# Altium PCB CAN Logger 3e HP3651 PCB.PcbDoc (part 1 of 3)
Units mm, origin at the board's own origin, x right, y up, seen from the top; angles counter-clockwise.
Board outline 56.62 x 82.65 mm, 4 copper layers (Component Side, Signal Layer 2, Signal Layer 1, Solder Side), stack 0.844 mm thick; 116 components, 130 nets, 582 pads, 374 vias.
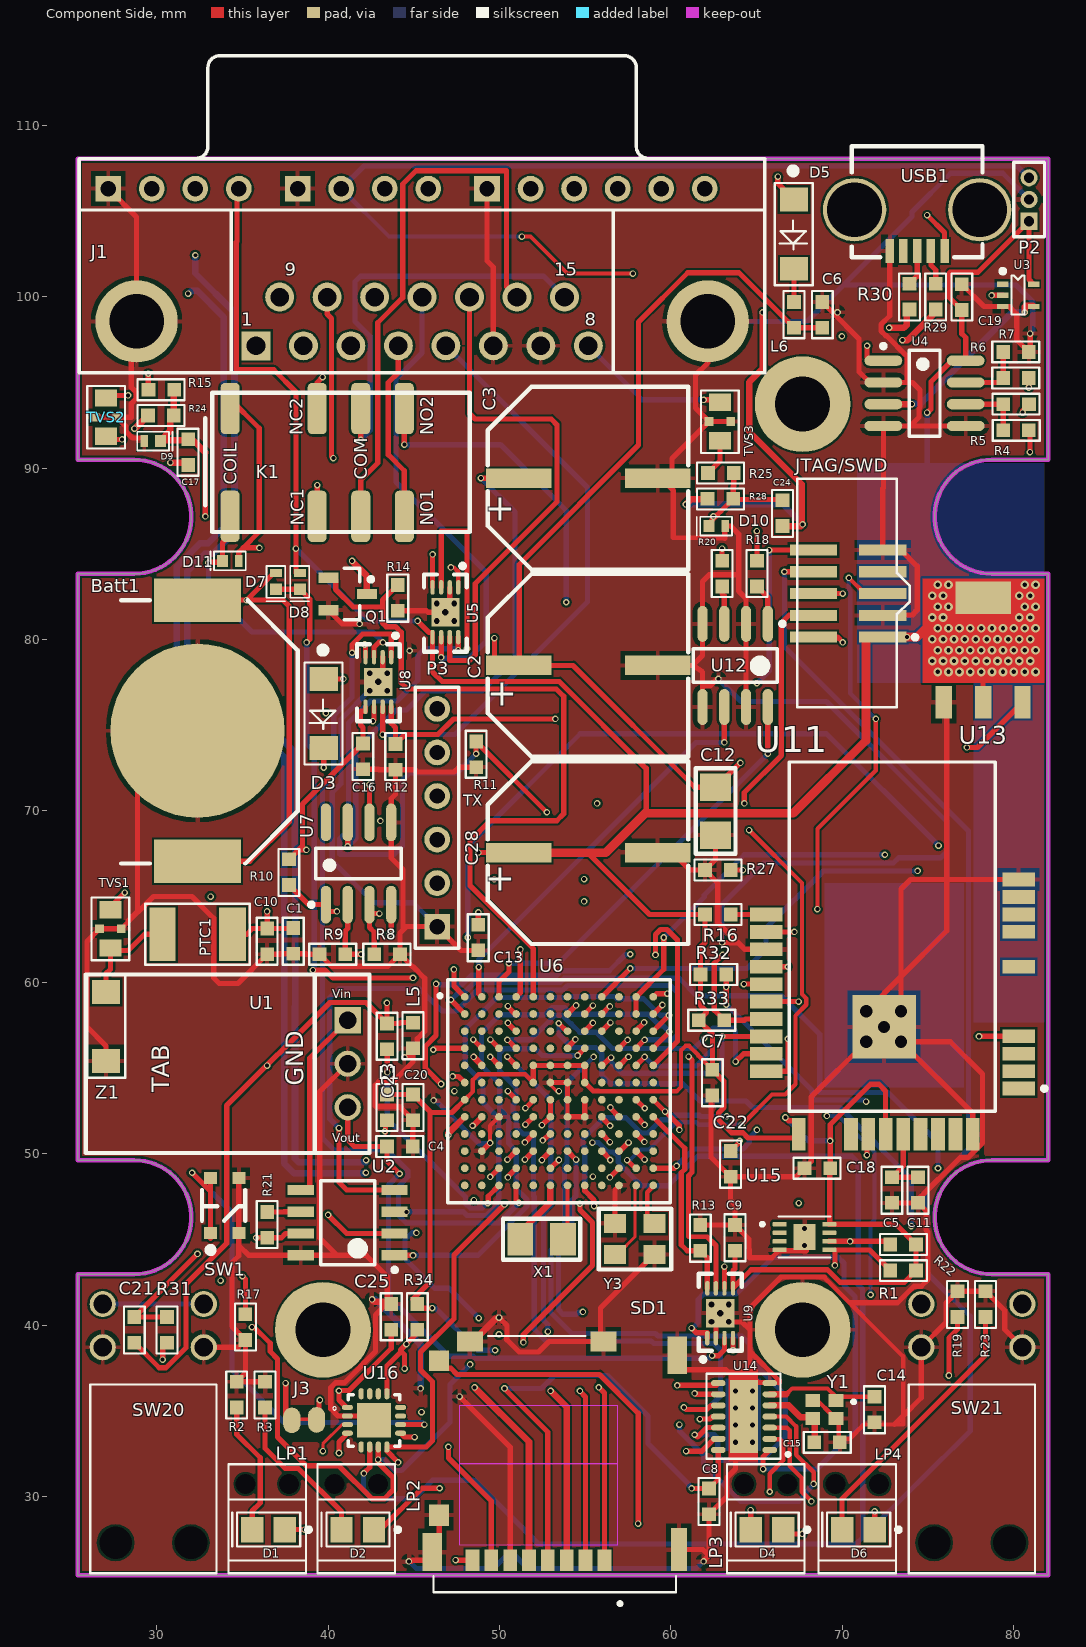
[diagram p0: Component Side view]
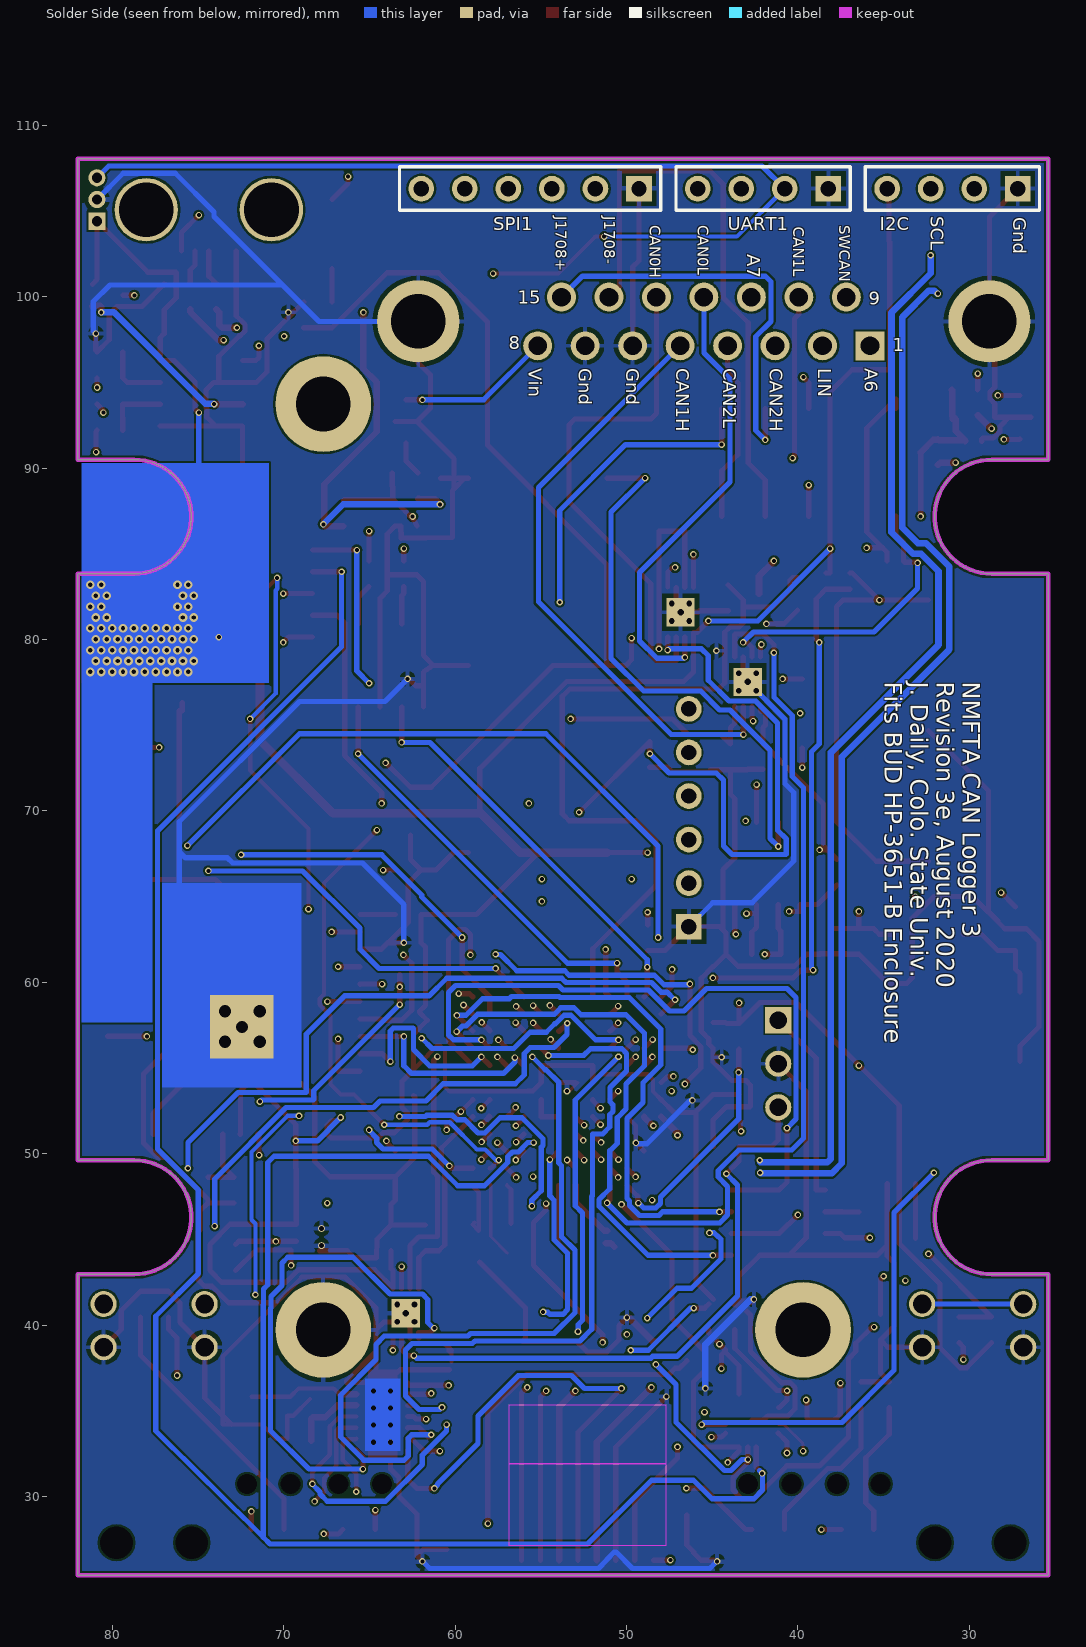
[diagram p1: Solder Side view, seen from below]
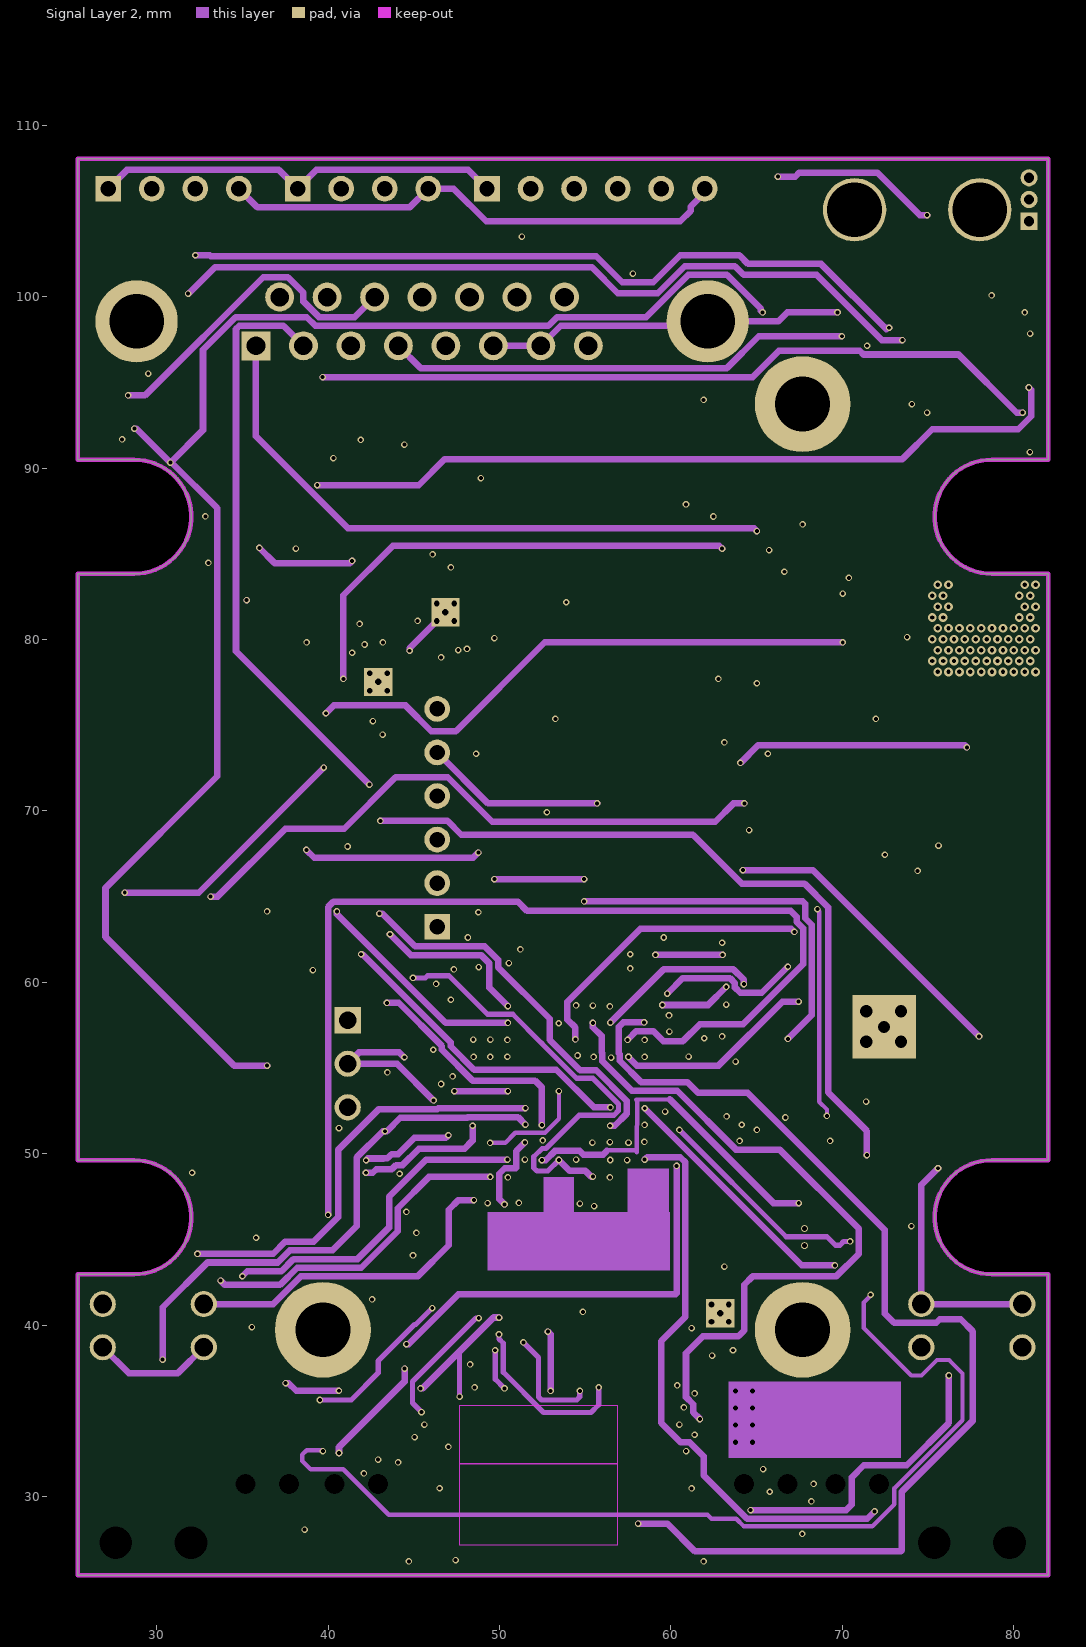
[diagram p2: Signal Layer 2]
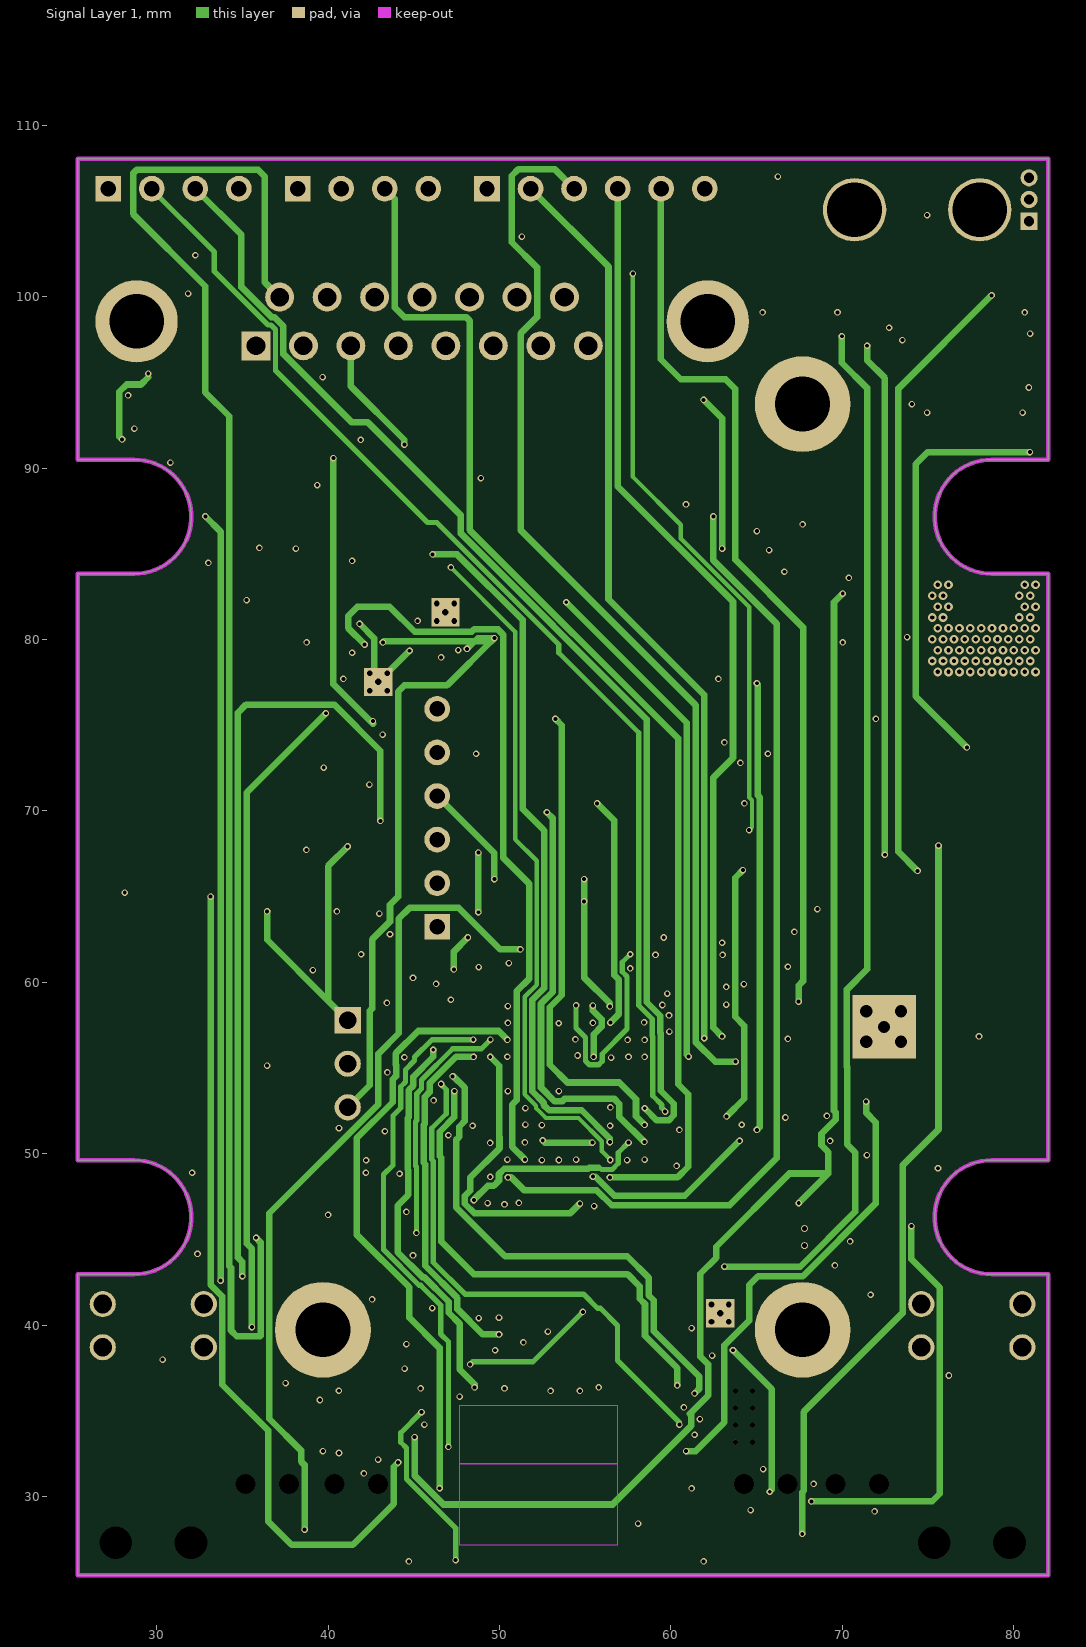
[diagram p3: Signal Layer 1]

## Layer stack, top to bottom
Top Solder: solder mask 0.0102, Solder Resist, Dk 3.5
Component Side: signal copper 0.0356
Dielectric 1: core 0.32, FR-4, Dk 4.8
Signal Layer 2: signal copper 0.036
Dielectric 5: prepreg 0.127, Dk 4.2
Signal Layer 1: signal copper 0.036
Dielectric 4: core 0.254, Dk 4.2
Solder Side: signal copper 0.0356
Bottom Solder: solder mask 0.0102, Solder Resist, Dk 3.5

## Board outline
25.4,25.4 25.4,42.964 28.702,42.964 ccw(c28.702,46.291) 28.702,49.619 25.4,49.619 25.4,83.833 28.702,83.833 ccw(c28.702,87.16) 28.702,90.487 25.4,90.487 25.4,108.052 82.017,108.052 82.017,90.487 78.715,90.487 ccw(c78.715,87.16) 78.715,83.833 82.017,83.833 82.017,49.619 78.715,49.619 ccw(c78.715,46.291) 78.715,42.964 82.017,42.964 82.017,25.4

## Design rules (kind name [scope] priority, off if disabled: settings)
Clearance [InComponent('U16')] p1: gap=0.076 ignorepadtopadclearanceinfootprint=TRUE
Clearance Clearance_1 [All] p2: gap=0.127 ignorepadtopadclearanceinfootprint=TRUE
DiffPairsRouting [All] p1: maxlimit=0.254 minlimit=0.254 mostfreqgap=0.254 toplayer_minwidth=0.381 toplayer_maxwidth=0.381 toplayer_prefwidth=0.381 midlayer1_minwidth=0.381 midlayer1_maxwidth=0.381 midlayer1_prefwidth=0.381 midlayer2_minwidth=0.381 midlayer2_maxwidth=0.381 midlayer2_prefwidth=0.381 bottomlayer_minwidth=0.381 bottomlayer_maxwidth=0.381 bottomlayer_prefwidth=0.381 maxuncoupledlength=12.7
HoleSize [All] p1: absolutevalues=TRUE maxlimit=6.35 minlimit=0.229 maxpercent=80.000 minpercent=20.000
MinimumSolderMaskSliver [All] p1: minsoldermaskwidth=0.025
PolygonConnect [All] p1: connectstyle=Relief reliefconductorwidth=0.254 reliefentries=4 polygonreliefangle="90 Angle" airgapwidth=0.254
RoutingVias [All] p1: holewidth=0.229 width=0.381 viastyle="Through Hole" minholewidth=0.229 minwidth=0.381 maxholewidth=0.711 maxwidth=1.27
SMDNeckDown [All] p1: percent=150.000
SilkToSilkClearance [All] p1: silktosilkclearance=0.025
SilkToSolderMaskClearance [IsPad] p1: minsilkscreentomaskgap=0.025 clearancetoexposedcopper=TRUE
SolderMaskExpansion [All] p1: expansion=0.102
Width Width_1 [All] p1: maxlimit=2.54 minlimit=0.178 preferedwidth=0.381 toplayer_prefwidth=0.305 midlayer1_minwidth=0.254 midlayer2_minwidth=0.254 bottomlayer_minwidth=0.254 bottomlayer_prefwidth=0.305 minimp=50.000000 maximp=50.000000 favimp=50.000000
25 further rules are at their usual default settings.

## Classes and differential pairs
component class "DIY Teensy 3.6 rev 3e": Batt1 C7 C13 C16 C18 C19 C20 C21 C22 C23 C25 D7 D8 J3 JTAG/SWD L1 L5 R31 R34 SD1 SW1 U6 U16 X1 Y3
component class "Teensy 3.6 with J1939 - Handheld Rev3e": C9 C10 C14 C15 C17 C24 D1 D2 D4 D6 D9 D10 I2C J1 P2 R2 R3 R8 R9 R10 R11 R12 R13 R15 R18 R19 R20 R21 R23 R24 R25 R28 R32 R33 SW20 SW21 TVS2 TVS3 U2 U5 U7 U8 U9 U12 U14 UART1 Y1
component class "Additional Circuits - Handheld - Rev 3e": C1 C2 C3 C4 C5 C6 C8 C11 C12 C28 D3 D5 D11 K1 L6 LP1 LP2 LP3 LP4 P3 PTC1 Q1 R1 R4 R5 R6 R7 R14 R16 R17 R22 R27 R29 R30 SPI1 TVS1 U1 U3 U4 U11 U13 U15 USB1 Z1
differential pair "USB D": +"USB D_P" -"USB D_N"

## Components (designator, comment, footprint, x,y, rotation, side; value= is the part's Value field where it differs from the comment)
Batt1 "CR1225" "Battery Clip - CR1225" 32.385,74.676 r270 top locked
C1 "0.1uF" 0603 37.973,62.41 r90 top
C2 "470µF" "Elec. Cap - G" 55.184,78.486 r180 top locked
C3 "100uF" "Elec. Cap - G" 55.184,89.408 r180 top locked
C4 "0.1uF" 0603 44.196,50.419 r0 top
C5 "0.1uF" 0603 72.898,47.879 r90 top
C6 "0.1uF" 0603 68.834,98.933 r270 top
C7 "0.1uF" 0603 62.423,54.149 r90 top
C8 "0.1uF" 0603 62.23,29.718 r90 top
C9 "0.1uF" 0603 63.738,45.085 r270 top
C10 "2.2uF" 0603 36.449,62.381 r270 top
C11 "0.1uF" 0603 74.422,47.879 r90 top
C12 "22uF" 1206 62.611,69.98 r90 top
C13 "0.1uF" 0603 48.768,62.611 r90 top
C14 "16pF" 0603 71.884,35.073 r90 top
C15 "16pF" 0603 69.11,33.163 r180 top
C16 "2.2uF" 0603 42.037,73.181 r90 top
C17 "0.1uF" 0603 31.839,90.932 r90 top
C18 "0.1uF" 0603 68.547,49.149 r0 top
C19 "0.1uF" 0603 76.976,99.972 r270 top
C20 "0.1uF" 0603 44.958,52.705 r90 top
C21 "0.1uF" 0603 28.702,39.726 r90 top
C22 "0.1uF" 0603 63.488,49.403 r90 top
C23 "0.1uF" 0603 43.446,56.84 r270 top
C24 "0.1uF" 0603 66.517,87.364 r90 top
C25 "0.1uF" 0603 43.688,40.476 r270 top
C28 "470µF" "Elec. Cap - G" 55.184,67.564 r180 top locked
D1 "Green" "0805 POLARIZED" 36.576,28.067 r180 top
D2 "Red" "0805 POLARIZED" 41.783,28.067 r180 top
D3 "ACURA107-HF" "SMA with A and K" 39.751,77.699 r270 top
D4 "Yellow" "0805 POLARIZED" 65.659,28.067 r180 top
D5 "ACURA107-HF" "SMA with A and K" 67.183,105.664 r270 top
D6 "Blue" "0805 POLARIZED" 70.993,28.067 r180 top
D7 "Diode" CST2C 36.957,83.881 r180 top
D8 "Diode" CST2C 38.354,83.881 r180 top
D9 "Diode" CST2C 29.277,91.567 r270 top
D10 "Diode" CST2C 63.168,86.614 r90 top
D11 "Diode" CST2C 34.798,84.582 r90 top
I2C "Header 4" HDR1X4 27.178,106.299 r0 bottom
J1 "Vehicle Interface Cable Connector" DSUB1.385-2H15 45.489,108.052 r0 top locked
J3 "Solder Jumper" "Solder Jumper" 38.862,34.417 r0 top
JTAG/SWD "JTAG/SWD" "JTAG 10-pin Header" 70.346,82.677 r90 top locked
K1 "EE2-5NU" "RELAY - EE2" 34.29,93.472 r0 top
L1 "1k" 0603 43.446,52.705 r90 top
L5 "1k" 0603 44.958,56.896 r90 top
L6 "1k" 0603 67.183,98.933 r270 top
LP1 "SLP3" PCBComponent_1 38.71,31.877 r180 top locked
LP2 "SLP3" PCBComponent_1 43.917,31.877 r180 top locked
LP3 "SLP3" PCBComponent_1 67.793,31.877 r180 top locked
LP4 "SLP3" PCBComponent_1 73.127,31.877 r180 top locked
P2 "DNP GP-20U7 JST Header" MHDR1X3 80.899,104.394 r90 top
P3 "Header 6" HDR1X6 46.367,63.246 r90 top
PTC1 "PTC RESTTBLE 0.75A" 1812 32.385,62.801 r0 top
Q1 "NUD3124" SOT23_N 41.148,82.654 r0 top
R1 "4.7k" 0603 73.558,43.18 r180 top
R2 "100" 0603 34.671,35.941 r90 top
R3 "330" 0603 36.322,35.941 r90 top
R4 "4.7k" 0603 80.137,92.202 r180 top
R5 "47" 0603 80.149,93.726 r0 top
R6 "47" 0603 80.137,95.25 r0 top
R7 "4.7k" 0603 80.137,96.774 r0 top
R8 "100k" 0603 43.446,61.63 r0 top
R9 "100k" 0603 40.259,61.636 r180 top
R10 "4.7k" 0603 37.719,66.421 r90 top
R11 "100k" 0603 48.641,73.291 r270 top
R12 "100k" 0603 43.942,73.152 r270 top
R13 "100k" 0603 61.722,45.085 r90 top
R14 "100k" 0603 44.069,82.423 r90 top
R15 "100k" 0603 30.277,94.564 r0 top
R16 "100k" 0603 62.738,63.952 r180 top
R17 "100k" 0603 35.179,39.878 r270 top
R18 "10k" 0603 65.024,83.833 r270 top
R19 "330" 0603 76.729,41.224 r90 top
R20 "10k" 0603 62.992,83.833 r270 top
R21 "4.7k" 0603 36.449,45.847 r270 top
R22 "4.7k" 0603 73.558,44.704 r180 top
R23 "330" 0603 78.359,41.224 r90 top
R24 "10k" 0603 30.248,93.066 r180 top
R25 "100k" 0603 62.918,89.709 r0 top
R27 "100k" 0603 62.738,66.548 r180 top
R28 "10k" 0603 62.889,88.202 r180 top
R29 "47" 0603 75.452,100.001 r90 top
R30 "47" 0603 73.928,100.001 r90 top
R31 "330" 0603 30.607,39.726 r90 top
R32 "100k" 0603 62.484,60.452 r180 top
R33 "100k" 0603 62.373,57.785 r180 top
R34 "10k" 0603 45.206,40.476 r270 top locked
SD1 "503182-1852" *MOLEX_503182-1852_503182-1852(PRIMARY) 53.226,32.639 r180 top locked
SPI1 "Header 6" HDR1X6 49.276,106.299 r0 bottom
SW1 "PTS830" "Switch PTS830" 33.147,45.381 r90 top
SW20 "PB400" PB400 26.86,41.224 r270 top locked
SW21 "PB400" PB400 74.612,41.224 r270 top locked
TVS1 "Varistor 42V" TRANSFEED 27.305,64.389 r270 top
TVS2 "Varistor 42V" TRANSFEED 27.051,94.234 r270 top
TVS3 "Varistor 42V" TRANSFEED 62.865,93.98 r270 top
U1 "OKI-78SR" OKI-78SR 41.148,52.705 r90 top locked
U2 "NCV7356D1R2G" ONSC-SOIC-8-751-07_V 41.148,45.974 r180 top
U3 "74AHCT1G14" SOT-353 80.264,100.076 r270 top
U4 "SN75HVD08DR" SOIC-SN8_N 74.803,94.361 r0 top
U5 "MCP2558" TDFN 46.851,81.587 r180 top
U6 "MK66FX1M0VMD18" *BGA144C100P12X12_1300X1300X170_MK66FX1M0VMD18(Primary) 53.475,53.649 r0 top locked
U7 "MCP2003A-E/SN" SOIC-SN8_N 41.783,66.929 r90 top
U8 "MCP2558" TDFN 42.938,77.523 r180 top
U9 "MCP2558" TDFN 62.877,40.693 r0 top
U11 "ATML-ATWINC1500-MR210PA-28" ATML-ATWINC1500-MR210PA-28_V 72.923,58.559 r180 top locked
U12 "MOCD207R2M" SOIC-8 63.754,78.486 r270 top
U13 "NCP1117LPST33" SOT-223 75.918,76.327 r0 top
U14 "MCP2517FD" SOP14 65.77,32.713 r180 top
U15 "ATECC608A-MAHDA-T" SON50P200X300X60-9N 67.797,45.136 r0 top
U16 "MKL02Z32VFG4" *QFN50P300X300X65-17N 42.684,34.443 r0 top locked
UART1 "Header 4" HDR1X4 38.227,106.299 r0 bottom
USB1 "UX60SC-MB-5S8" "USB Mini UX60S" 74.371,108.767 r180 top
X1 "32.768 KHz" "XTAL 2-pad Small" 53.708,45.006 r180 top
Y1 "ECS-400-10-37B-CKY-TR" *XTAL_ECS-160-9-37-CKM-TR 68.961,35.073 r180 top
Y3 "16MHz" "XTAL 4 pad" 56.744,44.12 r0 top
Z1 "SMA6J" SMA 27.051,55.397 r90 top

## Footprints (in the part's own frame and the unit in brackets; to place one, negate y for a bottom-side part, rotate by r counter-clockwise, add the part's x,y. Pads: shape width x height; smd on the part's side, far side on the other; paste and mask are expansions set on the pad)
0603 [mm] "0603 SMP Component with outline"
  rect 0.8x0.8 smd: 1(-0.75,0) 2(0.75,0)
  silkscreen extent -1.39,-0.61 1.36,0.61
"0805 POLARIZED" [mm] "Polarized 0805 with Pin 1 as Anode (+)"
  rect 1.3x1.5 smd: 1(-0.899,0) 2(1.001,0)
  silkscreen extent -2.39,-0.99 2.16,0.99
1206 [mm]
  rect 1.6x1.8 smd: 1(-1.4,0) 2(1.4,0)
  silkscreen extent -2.47,-1.16 2.5,1.15
1812 [mil] "Used for PTC Fuses from belfuse"
  rect 60x122 smd: 1(-80,0)
  rect 62x122 smd: 2(80,0)
  silkscreen extent -120,-70 120,70
*BGA144C100P12X12_1300X1300X170_MK66FX1M0VMD18(Primary) [mm]
  round 0.45 smd: A1(-5.5,5.5) A2(-4.5,5.5) A3(-3.5,5.5) A4(-2.5,5.5) A5(-1.5,5.5) A6(-0.5,5.5) A7(0.5,5.5) A8(1.5,5.5) A9(2.5,5.5) A10(3.5,5.5) A11(4.5,5.5) A12(5.5,5.5) B1(-5.5,4.5) B2(-4.5,4.5) B3(-3.5,4.5) B4(-2.5,4.5) B5(-1.5,4.5) B6(-0.5,4.5) B7(0.5,4.5) B8(1.5,4.5) B9(2.5,4.5) B10(3.5,4.5) B11(4.5,4.5) B12(5.5,4.5) C1(-5.5,3.5) C2(-4.5,3.5) C3(-3.5,3.5) C4(-2.5,3.5) C5(-1.5,3.5) C6(-0.5,3.5) C7(0.5,3.5) C8(1.5,3.5) C9(2.5,3.5) C10(3.5,3.5) C11(4.5,3.5) C12(5.5,3.5) D1(-5.5,2.5) D2(-4.5,2.5) D3(-3.5,2.5) D4(-2.5,2.5) D5(-1.5,2.5) D6(-0.5,2.5) D7(0.5,2.5) D8(1.5,2.5) D9(2.5,2.5) D10(3.5,2.5) D11(4.5,2.5) D12(5.5,2.5) E1(-5.5,1.5) E2(-4.5,1.5) E3(-3.5,1.5) E4(-2.5,1.5) E5(-1.5,1.5) E6(-0.5,1.5) E7(0.5,1.5) E8(1.5,1.5) E9(2.5,1.5) E10(3.5,1.5) E11(4.5,1.5) E12(5.5,1.5) F1(-5.5,0.5) F2(-4.5,0.5) F3(-3.5,0.5) F4(-2.5,0.5) F5(-1.5,0.5) F6(-0.5,0.5) F7(0.5,0.5) F8(1.5,0.5) F9(2.5,0.5) F10(3.5,0.5) F11(4.5,0.5) F12(5.5,0.5) G1(-5.5,-0.5) G2(-4.5,-0.5) G3(-3.5,-0.5) G4(-2.5,-0.5) G5(-1.5,-0.5) G6(-0.5,-0.5) G7(0.5,-0.5) G8(1.5,-0.5) G9(2.5,-0.5) G10(3.5,-0.5) G11(4.5,-0.5) G12(5.5,-0.5) H1(-5.5,-1.5) H2(-4.5,-1.5) H3(-3.5,-1.5) H4(-2.5,-1.5) H5(-1.5,-1.5) H6(-0.5,-1.5) H7(0.5,-1.5) H8(1.5,-1.5) H9(2.5,-1.5) H10(3.5,-1.5) H11(4.5,-1.5) H12(5.5,-1.5) J1(-5.5,-2.5) J2(-4.5,-2.5) J3(-3.5,-2.5) J4(-2.5,-2.5) J5(-1.5,-2.5) J6(-0.5,-2.5) J7(0.5,-2.5) J8(1.5,-2.5) J9(2.5,-2.5) J10(3.5,-2.5) J11(4.5,-2.5) J12(5.5,-2.5) K1(-5.5,-3.5) K2(-4.5,-3.5) K3(-3.5,-3.5) K4(-2.5,-3.5) K5(-1.5,-3.5) K6(-0.5,-3.5) K7(0.5,-3.5) K8(1.5,-3.5) K9(2.5,-3.5) K10(3.5,-3.5) K11(4.5,-3.5) K12(5.5,-3.5) L1(-5.5,-4.5) L2(-4.5,-4.5) L3(-3.5,-4.5) L4(-2.5,-4.5) L5(-1.5,-4.5) L6(-0.5,-4.5) L7(0.5,-4.5) L8(1.5,-4.5) L9(2.5,-4.5) L10(3.5,-4.5) L11(4.5,-4.5) L12(5.5,-4.5) M1(-5.5,-5.5) M2(-4.5,-5.5) M3(-3.5,-5.5) M4(-2.5,-5.5) M5(-1.5,-5.5) M6(-0.5,-5.5) M7(0.5,-5.5) M8(1.5,-5.5) M9(2.5,-5.5) M10(3.5,-5.5) M11(4.5,-5.5) M12(5.5,-5.5)
  silkscreen extent -7.05,-6.5 6.5,6.5
*MOLEX_503182-1852_503182-1852(PRIMARY) [mm]
  rect 0.8x1.24 smd: 1(-2.9,6.355) 2(-1.8,6.355) 3(-0.7,6.355) 4(0.4,6.355) 5(1.5,6.355) 6(2.6,6.355) 7(3.7,6.355) 8(4.8,6.355)
  rect 1.16x1.2 smd: DT(6.74,-5.275)
  rect 0.95x2.5 smd: P1(-7.245,5.725)
  rect 1.15x2.2 smd: P2(7.145,5.875) P3(-7.145,-5.605)
  rect 1.5x1.15 smd: P4(-2.84,-6.4) P5(4.94,-6.4)
  rect 1.16x1.25 smd: SW(6.74,3.725)
  Keep-Out Layer region: -3.655,5.485 5.55,5.485 5.55,0.726 -3.655,0.726
  Keep-Out Layer region: -3.659,0.725 5.55,0.725 5.55,-2.682 -3.659,-2.682
  silkscreen extent -7.07,-6.72 7.07,8.99
*QFN50P300X300X65-17N [mm]
  oval 0.65x0.3 smd: 1(-1.55,0.75) 2(-1.55,0.25) 3(-1.55,-0.25) 4(-1.55,-0.75) 9(1.55,-0.75) 10(1.55,-0.25) 11(1.55,0.25) 12(1.55,0.75)
  oval 0.3x0.65 smd: 5(-0.75,-1.55) 6(-0.25,-1.55) 7(0.25,-1.55) 8(0.75,-1.55) 13(0.75,1.55) 14(0.25,1.55) 15(-0.25,1.55) 16(-0.75,1.55)
  rect 2x2 smd: 17(0,0)
  silkscreen extent -2.4,-1.5 1.5,1.5
*XTAL_ECS-160-9-37-CKM-TR [mm]
  rect 0.85x0.75 smd: 1(-0.675,-0.525) 2(0.675,-0.525) 3(0.675,0.525) 4(-0.675,0.525)
  silkscreen extent -1.8,-0.55 -1.6,-0.35
ATML-ATWINC1500-MR210PA-28_V [mm] "Module, 28-Leads, Body 21.72x14.73mm, Pitch 1.016mm"
  rect 1.9x0.8 smd: 1(-7.365,4.761) 2(-7.365,3.745) 3(-7.365,2.729) 4(-7.365,1.713) 5(-7.365,-2.351) 6(-7.365,-4.383) 7(-7.365,-5.399) 8(-7.365,-6.415) 9(-7.365,-7.431) 10(7.365,-5.393) 11(7.365,-4.377) 12(7.365,-3.361) 13(7.365,-2.345) 14(7.365,-1.329) 15(7.365,-0.313) 16(7.365,0.703) 17(7.365,1.719) 18(7.365,2.735) 19(7.365,3.751)
  rect 0.8x1.9 smd: 20(5.465,7.431) 21(2.417,7.431) 22(1.401,7.431) 23(0.385,7.431) 24(-0.631,7.431) 25(-1.647,7.431) 26(-2.663,7.431) 27(-3.679,7.431) 28(-4.695,7.431)
  rect 3.7x3.7 hole 0.711: 29(0.485,1.161)
  silkscreen extent -8.99,-14.29 6.01,6.08, body extent -7.36,-14.29 7.36,7.43, height 3.35
"Battery Clip - CR1225" [mm] "Battery Holder Outlline for CR2032"
  rect 2.54x5.08 smd: 1(-7.62,0) 1(7.62,0)
  round 10.16 smd: 2(0,0)
  silkscreen extent -7.62,-4.45 7.75,5.84
CST2C [mm] "Toshiba 0603 diode"
  rect 0.7x0.45 smd: 1(0,0)
  rect 0.7x0.65 smd: 2(0,0.95)
  silkscreen extent -0.55,-0.4 0.55,1.65
DSUB1.385-2H15 [mm] "Connector; D Subminiature; 15 Position; Right Angle; Pitch 1.385 mm"
  rect 1.69x1.69 hole 1.09: 1(-9.695,-10.92)
  round 1.69 hole 1.09: 2(-6.925,-10.92) 3(-4.155,-10.92) 4(-1.385,-10.92) 5(1.385,-10.92) 6(4.155,-10.92) 7(6.925,-10.92) 8(9.695,-10.92) 9(-8.31,-8.08) 10(-5.54,-8.08) 11(-2.77,-8.08) 12(0,-8.08) 13(2.77,-8.08) 14(5.54,-8.08) 15(8.31,-8.08)
  round 4.8 hole 3.18: 16(-16.66,-9.5) 17(16.66,-9.5)
  silkscreen extent -20,-12.5 20,6
"Elec. Cap - G" [mil] "Panasonic Style Electrolytic capacitor, Can size G, 10mm diameter"
  rect 150x45 smd: 1(159.45,0) 2(-159.45,0)
  silkscreen extent -229,-210 231,210
HDR1X4 [mm] "Connector; Header; 4 Position"
  rect 1.5x1.5 hole 0.9: 1(0,0)
  round 1.5 hole 0.9: 2(2.54,0) 3(5.08,0) 4(7.62,0)
  silkscreen extent -1.27,-1.27 8.89,1.27
HDR1X6 [mm] "Connector; Header; 6 Position"
  rect 1.5x1.5 hole 0.9: 1(0,0)
  round 1.5 hole 0.9: 2(2.54,0) 3(5.08,0) 4(7.62,0) 5(10.16,0) 6(12.7,0)
  silkscreen extent -1.27,-1.27 13.97,1.27
"JTAG 10-pin Header" [mm] "1.27mm pitch Box Header SMT Type"
  rect 0.65x2.76 smd: 1(-2.54,-2.02) 2(-2.54,2.02) 3(-1.27,-2.02) 4(-1.27,2.02) 5(0,-2.02) 6(0,2.02) 7(1.27,-2.02) 8(1.27,2.02) 9(2.54,-2.02) 10(2.54,2.02)
  silkscreen extent -6.64,-4.03 6.71,2.97
MHDR1X3 [mm] "Connector; Header; 3 Position"
  rect 1x1 hole 0.6: 1(0,0)
  round 1 hole 0.6: 2(1.27,0) 3(2.54,0)
  silkscreen extent -0.9,-0.9 3.44,0.9
OKI-78SR [mil] "Horizontal Mount SIP DC/DC Converter"
  rect 60x60 hole 40: 1(200,0)
  round 60 hole 40: 2(100,0) 3(0,0)
  silkscreen extent -105,-50 305,602
ONSC-SOIC-8-751-07_V [mm] "SOIC, 8-Leads, Body 4.9x3.9mm, Pitch 1.27mm"
  rect 1.52x0.6 smd: 1(-2.74,1.905) 2(-2.74,0.635) 3(-2.74,-0.635) 4(-2.74,-1.905) 5(2.74,-1.905) 6(2.74,-0.635) 7(2.74,0.635) 8(2.74,1.905)
  silkscreen extent -2.87,-2.45 1.58,2.88, body extent -1.95,-2.45 1.95,2.45, height 1.75
PB400 [mil]
  round 60 hole 43: 1(0,0) 2(99,0) 3(0,232) 4(99,232)
  round 0 hole 75: ""(548,29.5) ""(548,202.5)
  silkscreen extent 185,-29 618,261
PCBComponent_1 [mil]
  round 0 hole 46: ""(39,45) ""(139,45)
  silkscreen extent 0,0 178,250
"RELAY - EE2" [mm] "EE2 Relay"
  rrect50% 1.11x3 smd: 1(7.62,0) 2(5.08,0) 3(10.16,0) 4(7.62,-6.29) 5(5.08,-6.29) 6(10.16,-6.29) 7(0,-6.29) 8(0,0)
  silkscreen extent -1.45,-7.2 13.98,0.92
SMA [mil] "SMA with outline"
  rect 55x65 smd: 1(0,0) 2(159,0)
  silkscreen extent -38,-44 197,43
"SMA with A and K" [mil] "SMA with outline and Cathode Bar on Pin 2"
  rect 55x65 smd: 1(0,0) 2(159,0)
  silkscreen extent -71,-44 197,43
SOIC-8 [mm]
  oval 2.1x0.6 smd: 1(-2.425,1.905) 2(-2.425,0.635) 3(-2.425,-0.635) 4(-2.425,-1.905) 5(2.425,-1.905) 6(2.425,-0.635) 7(2.425,0.635) 8(2.425,1.905)
  silkscreen extent -2.55,-2.45 0.98,2.88
SOIC-SN8_N [mm] "SOIC, 8-Leads, Body 4.9x3.8mm, Pitch 1.27mm, IPC Medium Density"
  oval 2.2x0.6 smd: 1(-2.4,1.905) 2(-2.4,0.635) 3(-2.4,-0.635) 4(-2.4,-1.905) 5(2.4,-1.905) 6(2.4,-0.635) 7(2.4,0.635) 8(2.4,1.905)
  silkscreen extent -2.52,-2.5 0.9,2.88, body extent -2,-2.5 2,2.5, height 1.75
"Solder Jumper" [mm]
  rrect100% 1x1.5 smd: 1(-0.974,0.025) 2(0.475,0.05)
SON50P200X300X60-9N [mm]
  rrect25% 0.81x0.26 smd: 1(-1.45,0.75) 2(-1.45,0.25) 3(-1.45,-0.25) 4(-1.45,-0.75) 5(1.45,-0.75) 6(1.45,-0.25) 7(1.45,0.25) 8(1.45,0.75)
  rect 1.3x1.5 smd paste-2: 9(0,0)
  round 0.4 hole 0.3: 9_1(0,0.5) 9_2(0,-0.5)
  silkscreen extent -2.56,-1.2 1.5,1.2
SOP14 [mm]
  oval 0.85x0.35 smd: 1(0,0) 2(0,-0.65) 3(0,-1.3) 4(0,-1.95) 5(0,-2.6) 6(0,-3.25) 7(0,-3.9) 8(3,-3.9) 9(3,-3.25) 10(3,-2.6) 11(3,-1.95) 12(3,-1.3) 13(3,-0.65) 14(3,0)
  round 0 hole 0.3: ""(1,-1.45) ""(1,-3.45) ""(1,-2.45) ""(1,-0.45) ""(2,-1.45) ""(2,-3.45) ""(2,-2.45)
  rect 1.65x4.25 smd: ""(1.5,-1.95)
  round 0.3 hole 0.3: ""(2,-0.45)
  silkscreen extent -1.14,-4.44 3.68,0.51
SOT23_N [mm] "SOT23, 3-Leads, Body 2.9x1.3mm, Pitch 0.95mm, Lead Span 2.3mm - Reverse Pinning, IPC Medium Density"
  rect 1.15x0.6 smd: 1(-1.125,0.95) 2(-1.125,-0.95) 3(1.125,0)
  silkscreen extent -0.2,-1.5 1.48,1.5, body extent -0.7,-1.5 0.7,1.5, height 1.1
SOT-223 [mm]
  rect 0.95x1.9 smd: 1(0,0) 2(2.3,0) 3(4.6,0)
  rect 3.25x1.9 smd: 4(2.3,6.1)
SOT-353 [mil]
  rect 12x26 smd: 1(-25.59,-35.43) 2(0,-35.43) 3(25.59,-35.43) 4(25.59,35.43) 6(-25.59,35.43)
  silkscreen extent -61,-40 44,15
"Switch PTS830" [mm] "Microminiature SMT Top Actuated C&K PTS830"
  rect 0.7x0.75 smd: 1(0,0) 2(3.2,0) 3(0,-1.65) 4(3.2,-1.65)
  silkscreen extent -1.1,-2.02 2.5,0.5
TDFN [mm] "8-Lead Plastic Dual Flat, No Lead Package (MN) – 2x3x0.75mm Body [TDFN]"
  rect 1.651x1.651 hole 0.381: 0(0,0)
  oval 0.25x0.85 smd: 1(-0.75,-1.45) 2(-0.25,-1.45) 3(0.25,-1.45) 4(0.75,-1.45) 5(0.75,1.45) 6(0.25,1.45) 7(-0.25,1.45) 8(-0.75,1.45)
  silkscreen extent -1.25,-2.83 1.25,2.3
TRANSFEED [mil] "AVX Multilayer Ceramic Transient Voltage Suppressors"
  rect 40x50 smd: 1(5.91,0) 2(94.09,0)
  rect 20x20 smd: 3(50,25) 3(50,-25)
  silkscreen extent -22,-43 122,43
"USB Mini UX60S" [mm] "Receptacle - Standard - Shell through Hole"
  round 3.7 hole 3.2: 0(-3.65,3.7) 0(3.65,3.7)
  rect 0.5x1.4 smd: 1(-1.6,6.1) 2(-0.8,6.1) 3(0,6.1) 4(1.6,6.1) 5(0.8,6.1)
  silkscreen extent -3.81,0 3.81,6.48
"XTAL 2-pad Small" [mm] "ECX-.327-CDX-1293SMD CRYSTAL"
  rect 1.5x1.9 smd: 1(0,0) 2(2.5,0)
  silkscreen extent -1,-1.2 3.5,1.2
"XTAL 4 pad" [mm] "16MHz ±30ppm Crystal 18pF 80 Ohms 4-SMD, No Lead XTAL 4 pad ECS Inc.  ECS-160-18-33Q-DS"
  rect 1.3x1.1 smd: 1(0,0) 2(2.3,0) 3(2.3,1.8) 4(0,1.8)
  silkscreen extent -0.95,-0.87 3.27,2.68

## Part data
Batt1: library part "CR2032 Battery Holder", "Lithium Battery Non-Rechargeable (Primary) 3V Coin, 12.5mm", Manufacturer=Linx, PartNumber=BAT-HLD-012-SMT, Supplier Part Number 1=BAT-HLD-012-SMT-ND, Supplier 1=Digi-Key
C1 C4 C5 C6 C7 C8 C9 C11 C13 C17 C18 C19 C20 C21 C22 C23 C24 C25: library part Cap, "CAP CER 0.1UF 50V X7R 0603", Manufacturer=KEMET, PartNumber=C0603C104K5RACAUTO, Supplier Part Number 1=399-6856-1-ND, Alternative=Acceptable, Supplier 1=Digi-Key
C2 C28: library part "Tantalum Cap_1", "470µF 16V Aluminum Electrolytic Capacitors Radial, Can - SMD  5000 Hrs @ 105°C", Manufacturer="Panasonic Electronic Components", PartNumber=EEE-HC1C471P, Supplier Part Number 1=PCE3751CT-ND, Supplier 1=Digi-Key
C3: library part "Tantalum Cap_1", "Aluminum Electrolytic Capacitors Radial, Can - SMD 5000 Hrs @ 105°C", Manufacturer="Panasonic Electronic Components", PartNumber=EEE-HC1H101P, Supplier Part Number 1=P19732CT-ND, Supplier 1=Digi-Key
C10 C16: library part Cap, "2.2µF ±10% 6.3V Ceramic Capacitor X5R 0603 (1608 Metric)", Manufacturer="Taiyo Yuden", PartNumber=JMK107BJ225KAHT, Supplier Part Number 1=587-3386-1-ND, Alternative=Acceptable, Supplier 1=Digi-Key
C12: library part Cap, "22µF ±20% 25V Ceramic Capacitor X5R 1206 (3216 Metric)", Manufacturer="Murata Electronics North America", PartNumber=GRT31CR61E226ME01L, Supplier Part Number 1=490-12451-1-ND, Supplier 1=Digi-Key
C14 C15: library part Cap, "16pF ±5% 50V Ceramic Capacitor C0G, NP0 0603 (1608 Metric)", Manufacturer=Yageo, PartNumber=CC0603JRNPO9BN160, Supplier Part Number 1=311-3964-1-ND, Alternative=Acceptable, Supplier 1=Digi-Key
D1: library part "LED - SMD", "Green 570nm LED Indication - Discrete 2.2V 0805 (2012 Metric)", Manufacturer="OSRAM Opto Semiconductors Inc.", PartNumber="LG R971-KN-1", Supplier Part Number 1=475-1410-1-ND, Supplier 1=Digi-Key
D2: library part "LED - SMD", "Red 633nm LED Indication - Discrete 2V 0805 (2012 Metric)", Manufacturer="OSRAM Opto Semiconductors Inc.", PartNumber="LS R976-NR-1", Supplier Part Number 1=475-1278-1-ND, Supplier 1=Digi-Key
D3 D5: library part "Schottky Diode", "Diode Schottky 1000V 1A Surface Mount DO-214AC (SMA)", Manufacturer="Comchip Technology", Supplier Part Number 1=641-1884-1-ND, PartNumber=ACURA107-HF, Supplier 1=Digi-Key
D4: library part "LED - SMD", "LED YELLOW DIFFUSED 0805 SMD", Manufacturer="OSRAM Opto Semiconductors Inc.", PartNumber="LY R976-PS-36", Supplier Part Number 1=475-2560-1-ND, Supplier 1=Digi-Key
D6: library part "LED - SMD", "Blue 470nm LED Indication - Discrete 3.3V 0805 (2012 Metric)", Manufacturer="Broadcom Limited", PartNumber=HSMN-C170, Supplier Part Number 1=516-1437-1-ND, Supplier 1=Digi-Key
D7 D8 D9 D10 D11: "Default Diode", Manufacturer="Toshiba Semiconductor and Storage", PartNumber=CCS15S30L3FCT-ND, Supplier 1=Digi-Key, Supplier Part Number 1=CCS15S30L3FCT-ND
I2C UART1: "Header, 4-Pin"
J1: library part "D Connector 15", "Receptacle Assembly, 15 Position, Right Angle", Manufacturer="Amphenol FCI", PartNumber=D15S33E4GV00LF, Supplier Part Number 1=609-1498-ND, Supplier 1=Digi-Key
JTAG/SWD: library part "JTAG Cortex", "Connector Header Surface Mount 10 position 0.050\" (1.27mm)", Manufacturer="CNC Tech", PartNumber=3221-10-0300-00, Supplier Part Number 1=1175-1735-ND, Supplier 1=Digi-Key
K1: library part "DPDT Relay", "General Purpose Relay DPDT (2 Form C) Surface Mount", Manufacturer=KEMET, PartNumber=EE2-5NU-L, Supplier Part Number 1=399-11017-1-ND, Supplier 1=Digi-Key
L1 L5 L6: library part "Ferrite Bead", "Ferrite Beads Multi-Layer Power 1KOhm 25% 100MHz 1A 200mOhm DCR 0603 Automotive T/R", Manufacturer=Murata, PartNumber=BLM18KG102SZ1D, Supplier Part Number 1=490-17350-1-ND, Alternative=Acceptable, Supplier 1=Digi-Key
LP1 LP2 LP3 LP4: "Light Pipe Single Clear Rigid Round with Domed Top, 3mm Board Mount, Press Fit, Right Angle", Manufacturer="Bivar Inc.", PartNumber=SLP3-150-250-R, Supplier Part Number 1=492-2517-ND, Supplier 1=Digi-Key
P2: library part MHDR1X3, "CONN HEADER PH SIDE 3POS 2MM SMD", Manufacturer=JST, PartNumber=S3B-PH-SM4-TB(LF)(SN), Supplier Part Number 1=455-1750-1-ND, Supplier 1=Digi-Key
P3 SPI1: "Header, 6-Pin"
PTC1: library part PTC, "PTC RESTTBLE 0.75A 33V CHIP 1812", Manufacturer="Bel Fuse Inc.", PartNumber=0ZCG0075BF2B, Supplier Part Number 1=507-1765-1-ND, Supplier 1=Digi-Key
Q1: library part IRLML6344TRPbF, "IC INDCT LOAD DRVR AUTO SOT23", Manufacturer="ON Semiconductor", PartNumber=NUD3124LT1G, Supplier Part Number 1=NUD3124LT1GOSCT-ND, Alternative=None, Supplier 1=Digi-Key
R1 R4 R7 R10 R21 R22: library part "Chip Resistor", "4.7 kOhms ±1% 0.1W, 1/10W Chip Resistor 0603 (1608 Metric) Automotive AEC-Q200, High Voltage Thick Film", Manufacturer="Rohm Semiconductor", PartNumber=KTR03EZPF4701, Supplier Part Number 1=RHM4.7KAYCT-ND, Alternative=Acceptable, Supplier 1=Digi-Key
R2: library part "Chip Resistor", "100 Ohms ±1% 0.1W, 1/10W Chip Resistor 0603 (1608 Metric) Automotive AEC-Q200, High Voltage Thick Film", Manufacturer="Rohm Semiconductor", PartNumber=KTR03EZPF1000, Supplier Part Number 1=RHM100AYCT-ND, Alternative=Acceptable, Supplier 1=Digi-Key
R3 R19 R23 R31: library part "Chip Resistor", "330 Ohms ±1% 0.1W, 1/10W Chip Resistor 0603 (1608 Metric) Automotive AEC-Q200, High Voltage Thick Film", Manufacturer="Rohm Semiconductor", PartNumber=KTR03EZPF3300, Supplier Part Number 1=RHM330AYCT-ND, Alternative=Acceptable, Supplier 1=Digi-Key
R5 R6 R29 R30: library part "Chip Resistor", "±1% 0.1W, 1/10W Chip Resistor 0603 (1608 Metric) Automotive AEC-Q200, High Voltage Thick Film", Manufacturer="Rohm Semiconductor", PartNumber=KTR03EZPF47R0, Supplier Part Number 1=RHM47AYCT-ND, Supplier 1=Digi-Key
R8 R9 R11 R12 R13 R14 R15 R16 R17 R25 R27 R32 R33: library part "Chip Resistor", "100 kOhms ±1% 0.1W, 1/10W Chip Resistor 0603 (1608 Metric) Automotive AEC-Q200, High Voltage Thick Film", Manufacturer="Rohm Semiconductor", PartNumber=KTR03EZPF1003, Supplier Part Number 1=RHM100KAYCT-ND, Alternative=Acceptable, Supplier 1=Digi-Key
R18 R20 R24 R28 R34: library part "Chip Resistor", "10 kOhms ±1% 0.1W, 1/10W Chip Resistor 0603 (1608 Metric) Automotive AEC-Q200, High Voltage Thick Film", Manufacturer="Rohm Semiconductor", PartNumber=KTR03EZPF1002, Supplier Part Number 1=RHM10.0KAYCT-ND, Alternative=Acceptable, Supplier 1=Digi-Key
SD1: "MICRO SD NORMAL ULTRALOWPRO8CKTE", Manufacturer=Molex, PartNumber=5031821852, Supplier Part Number 1=WM12834CT-ND, Supplier 1=Digi-Key
SW1: library part "Switch - Tactile_2", "Tactile Switch SPST-NO Top Actuated Surface Mount", Manufacturer="C & K Components", PartNumber="PTS830GM140 SMTR LFS", Supplier Part Number 1=CKN10587CT-ND, Supplier 1=Digi-Key
SW20 SW21: "Pushbutton Switch DPST-NO Standard Through Hole, Right Angle", Manufacturer=E-Switch, PartNumber=PB400OAQR1BLK, Supplier Part Number 1=EG5548-ND, Supplier 1=Digi-Key
TVS1 TVS2 TVS3: library part Transfeed, "VARISTOR CAP FEEDTHRU 18V 0805", Manufacturer=AVX, PartNumber=V2F118A400Y2EDP, Supplier Part Number 1=478-2485-1-ND, Supplier 1=Digi-Key
U1: library part 7805, "5V DC/DC Converter (7805 replacement)", Manufacturer="Murata Power Solutions Inc.", PartNumber=OKI-78SR-5/1.5-W36H-C, Supplier Part Number 1=811-2692-ND, Supplier 1=Digi-Key
U2: library part NCV7356D1G, "Single Wire CAN Transceiver, 5 to 27 V, 8-Pin SOIC, Pb-Free, Tube", Manufacturer="On Semiconductor", Supplier Part Number 1=NCV7356D1R2GOSCT-ND, PartNumber=NCV7356D1R2G, Supplier 1=Digi-Key
U3: library part "74AHCT1G14 Inverter", "IC SCHMIT-TRIGG INV GATE SOT353", Manufacturer="Diodes Incorporated", PartNumber=74AHCT1G14SE-7, Supplier Part Number 1=74AHCT1G14SE-7DICT-ND, Supplier 1=Digi-Key
U4: library part "SN75HVD12D (3.3v RS485)", "IC RS485 TXRX 3/5V 8-SOIC", Manufacturer="Texas Instruments", Supplier Part Number 1=296-37893-1-ND, PartNumber=SN75HVD08DR, Supplier 1=Digi-Key
U5: library part MCP2558FD, "Microchip CAN FD Transceiver with Silent Mode", Manufacturer="Microchip Technology", PartNumber=MCP2558FDT-H/MNY, Supplier Part Number 1=MCP2558FDT-H/MNYCT-ND, Supplier 1=Digi-Key
U6: "Kinetis K66: 180MHz Cortex-M4F MCU, 1.2MB Flash, 256KB SRAM, 2xUSB, Ethernet, 144-MAPBGA", Manufacturer="NXP USA Inc.", Supplier Part Number 1=568-13335-ND, PartNumber=MK66FX1M0VMD18, Supplier 1=Digi-Key
U7: library part MCP2003AT-E/SN, "LIN J2602 Transceiver, 8-Pin SOIC, Extended Temperature, Tape and Reel", Manufacturer="Microchip Technology", Supplier Part Number 1=MCP2003A-E/SN-ND, PartNumber=MCP2003A-E/SN, Supplier 1=Digi-Key
U8 U9: library part MCP2558FD, "Microchip CAN FD Transceiver with Silent Mode", Manufacturer=Microchip, PartNumber=MCP2558FDT-H/MNY, Supplier Part Number 1=MCP2558FDT-H/MNYCT-ND, Supplier 1=Digi-Key
U11: "SMARTCONNECT ATWINC1500B-MU-T MO", Manufacturer="Microchip Technologies", PartNumber=ATWINC1510-MR210PB1140, Supplier Part Number 1=ATWINC1510-MR210PB1140-ND, Supplier 1=Digi-Key
U12: library part "Optoisolator - Dual", "Optoisolator Transistor Output 2500Vrms 2 Channel 8-SO Tall", Manufacturer="Fairchild/ON Semiconductor", Supplier Part Number 1=MOCD207R2MCT-ND, PartNumber=MOCD207R2M, Supplier 1=Digi-Key
U13: library part "NCP1117 2.5V", "Linear Voltage Regulator IC Positive Fixed Output 3.3V 1A SOT-223", Manufacturer="On Semiconductor", PartNumber=NCP1117LPST33T3G, Supplier Part Number 1=NCP1117LPST33T3GOSCT-ND, Supplier 1=Digi-Key
U14: "CANbus Controller CAN 2.0 SPI Interface 14-VDFN (4.5x3)", Manufacturer="Microchip Technology", PartNumber=MCP2517FDT-H/JHA, Supplier Part Number 1=MCP2517FDT-H/JHACT-ND, Supplier 1=Digi-Key
U15: "Authentication Chip 8-UDFN _2x3_", Package="UDFN-8 Microchip Technology", Digi-Key_Part_Number=ATECC608A-MAHDA-TCT-ND, Digi-Key_Purchase_URL=https://www.digikey.com/product-detail/en/microchip-technology/ATECC608A-MAHDA-T/ATECC608A-MAHDA-TCT-ND/7928236?utm_source=snapeda&utm_medium=aggregator&utm_campaign=symbol, MF="Microchip Technology", MP=ATECC608A-MAHDA-T, SnapEDA_Link=https://www.snapeda.com/parts/ATECC608A-MAHDA-T/Microchip/view-part/3076417/?ref=snap
U16: "32 Bit Microcontroller, Kinetis L Series Ultra Low Power, ARM Cortex-M0+, 48 MHz, 32 KB, 4 KB, 16", Manufacturer=PJRC, PartNumber="Pre Programmed MKL02Z32VFG4", Supplier Part Number 1=IC_MKL02Z32_QFN16, Alternative="Sole Source", Supplier 1=PJRC
USB1: library part USB-Rugged, "USB - mini B USB 2.0 Receptacle Connector 5 Position Surface Mount, Right Angle; Through Hole", Manufacturer=Hirose, Supplier Part Number 1=H11589CT-ND, PartNumber=UX60SC-MB-5S8, Supplier 1=Digi-Key
X1: library part "Crystal Oscillator", "Canned Oscillator", Manufacturer="ECS Inc.", PartNumber=ECX-.327-CDX-1293, Supplier Part Number 1=XC2292CT-ND, Supplier 1=Digi-Key
Y3: library part "Crystal with Ground", "16MHz ±30ppm Crystal 18pF 80 Ohms 4-SMD, No Lead", Manufacturer="ECS Inc.", PartNumber=XC2866CT-ND, Supplier 1=Digi-Key, Supplier Part Number 1=XC2866CT-ND
Z1: library part "Zener - Bidirectional", "TVS DIODE 20VWM 36.8VC SMA", Manufacturer="Micro Commercial Co", PartNumber=SMA6J24CA-TP, Supplier Part Number 1=SMA6J24CA-TPMSCT-ND, Supplier 1=Digi-Key
Y1: BuyPart=https://www.snapeda.com/parts/ECS-400-10-37B-CKY-TR/ECS%20Inc./view-part/3655904/?ref=eda, SnapEDA_Link=https://www.snapeda.com/parts/ECS-400-10-37B-CKY-TR/ECS%20Inc./view-part/3655904/?ref=snap

## Free pads (board coordinates)
  round 5.588 hole 3.2: 0(39.7,39.726) 0(67.691,39.726) 0(67.691,93.726)

## Via types
v1: diameter 0.381, hole 0.229, Component Side to Solder Side, 292 vias
v2: diameter 0.508, hole 0.254, Component Side to Solder Side, 66 vias
v3: diameter 0.508, hole 0.33, Component Side to Solder Side, 12 vias
v4: diameter 1.27, hole 0.711, Component Side to Solder Side, 4 vias

## Nets (pads, with @x,y where several pads share a name; then routed paths per layer and width w, separated by ;. In a path a pad name is that pad's centre, name@x,y a point inside that pad or via, vN(x,y) a via of type N, cw(c..) or ccw(c..) an arc to the next point about the centre after c; other vN are vias at no path point)
3V3: C7.2 C8.2 C9.2 C13.2 C16.2 C18.2 C19.2 C20.2 C28.1 D8.1 I2C.4 J3.2 JTAG/SWD.1 L1.2 P2.1 R1.1 R10.2 R16.2 R22.1 R32.2 R33.2 R34.1 SD1.4 SPI1.6 U3.6 U4.8 U5.5 U6.E5 U6.E6 U6.E7 U6.E8 U6.F5 U6.F8 U6.G1 U8.5 U9.5 U11.20 U11.23 U13.2 U13.4 U14.14 U15.8 UART1.4 | length 341.7
  Component Side w0.254: U6.G1@47.975,53.149 48.454,53.628 48.454,54.305 48.777,54.628 51.496,54.628 U6.F5@51.975,54.149 ; 55.762,53.649 60.354,53.649 60.592,53.887 60.592,56.025 60.855,56.288 61.065,56.288 61.608,55.746 61.608,55.714 C7.2@62.423,54.899
  Component Side w0.305: I2C.4@34.798,106.299 34.696,106.299 34.696,103.226 34.646,103.175 34.646,95.758 34.671,95.733 36.83,95.733 38.125,94.437 v1(38.125,85.3) 38.125,83.881 D8.1@38.354,83.881 ; R10.2@37.719,67.171 38.271,67.723 ; v1(38.733,67.723) 38.271,67.723 ; J3.2@39.337,34.467 39.47,34.6 39.47,35.577 v1(39.522,35.629) ; U8.5@42.188,76.073 42.188,75.806 41.935,75.806 41.901,75.772 41.901,75.003 42.037,74.867 C16.2@42.037,73.931 38.506,70.401 38.506,67.958 38.271,67.723 ; L1.2@43.446,53.455 C20.2@44.958,53.455 45.949,52.464 ; R34.1@44.933,41.498 45.949,42.514 45.949,52.464 ; R34.1@45.206,41.226 45.443,40.988 v1(46.081,40.988) ; v1(45.224,81.079) 45.893,80.41 46.074,80.41 46.101,80.382 U5.5@46.101,80.137 46.101,78.105 46.66,77.546 53.493,77.546 58.56,72.48 58.56,69.926 ; U6.G1@47.975,53.149 47.226,52.4 46.013,52.4 45.949,52.464 ; C13.2@48.768,63.361 v1(48.768,64.084) ; v1(48.768,67.564) C28.1@51.134,67.564 ; v1(50.295,36.304) 50.295,36.282 52.826,33.752 SD1.4@52.826,26.284 ; U6.F5@51.975,54.149 U6.E5@51.975,55.149 U6.E6@52.975,55.149 U6.E7@53.975,55.149 U6.E8@54.975,55.149 U6.F8@54.975,54.149 55.475,53.649 55.762,53.649 ; 55.143,67.564 58.755,63.952 R16.2@61.988,63.952 61.988,62.306 61.734,62.052 R32.2@61.734,60.452 61.734,58.649 62.078,58.305 62.078,58.24 R33.2@61.623,57.785 62.423,56.985 C7.2@62.423,54.899 63.102,54.22 63.102,52.69 62.782,52.37 62.782,51.977 63.54,51.219 64.203,51.219 64.507,50.914 67.245,50.914 U11.20@67.458,51.128 67.458,51.678 67.211,51.926 66.863,51.926 v1(66.679,52.11) ; v1(61.214,30.468) C8.2@62.23,30.468 62.77,31.008 U14.14@62.77,32.713 ; U9.5@63.627,42.143 U9.5@63.627,42.164 ; C9.2@63.738,44.335 63.738,43.291 63.627,43.18 U9.5@63.627,42.164 ; U15.8@69.247,45.886 U15.8@69.25,45.886 ; JTAG/SWD.1@71.45,80.137 JTAG/SWD.1@72.366,80.137 ; U11.23@72.538,51.128 72.527,51.14 72.527,53.658 72.136,54.048 71.65,54.048 69.297,51.696 v1(69.297,50.749) C18.2@69.297,49.149 69.272,49.124 69.272,45.908 U15.8@69.25,45.886 ; v1(74.955,93.231) 74.976,93.231 75.155,93.409 75.171,93.409 75.171,95.034 76.403,96.266 U4.8@77.203,96.266 77.203,97.612 76.976,97.839 C19.2@76.976,99.222 76.276,99.922 76.276,101.397 76.302,101.422 77.927,101.422 P2.1@80.899,104.394 80.899,100.991 U3.6@81.164,100.726 ; U13.4@76.661,82.427 U13.4@78.218,82.427 U13.2@78.218,76.327 ; U9.5@63.627,42.164 64.694,43.231 69.143,43.231 69.873,42.501 73.629,42.501 R1.1@74.308,43.18 R22.1@74.308,44.704 73.127,45.886 U15.8@69.25,45.886
  Component Side w0.508: C28.1@51.134,67.564 55.143,67.564 56.197,67.564 58.56,69.926 58.623,69.863 67.145,69.863 71.387,74.105 71.387,80.073 JTAG/SWD.1@71.45,80.137 ; JTAG/SWD.1@72.366,80.137 v1(73.787,80.137) 74.371,80.137 U13.4@76.661,82.427
  Signal Layer 2 w0.305: v1(39.522,35.629) 41.356,35.629 42.926,37.199 42.926,37.901 45.053,40.028 45.12,40.028 v1(46.081,40.988) ; v1(49.753,38.532) 49.753,36.846 v1(50.295,36.304)
  Signal Layer 2 w0.381: I2C.4@34.798,106.299 35.89,105.207 44.755,105.207 UART1.4@45.847,106.299 47.327,106.299 49.232,104.394 60.55,104.394 61.156,105 61.156,105.25 61.976,106.07 SPI1.6@61.976,106.299 ; v1(38.733,67.723) 39.198,67.258 48.462,67.258 v1(48.768,67.564)
  Signal Layer 1 w0.381: v1(48.768,64.084) v1(48.768,67.564)
  Solder Side w0.305: v1(38.125,85.3) 42.347,81.079 v1(45.224,81.079) ; v1(46.081,40.988) 46.279,40.988 48.735,38.532 v1(49.753,38.532) ; v1(50.295,36.304) 52.461,36.304 53.215,37.059 56.312,37.059 58.674,34.697 58.674,33.096 61.036,30.734 61.036,30.666 61.214,30.489 v1(61.214,30.468) ; v1(66.679,52.11) 68.039,50.749 v1(69.297,50.749) ; v1(73.787,80.137) 73.787,82.118 71.958,83.947 71.958,85.684 75.006,88.732 75.006,89.738 74.955,89.789 v1(74.955,93.231)
  other v2: 75.565,78.105 76.2,78.105 76.835,78.105 77.47,78.105 78.105,78.105 78.74,78.105 79.375,78.105 80.01,78.105 80.645,78.105 81.28,78.105 75.248,78.74 75.882,78.74 76.517,78.74 77.153,78.74 77.787,78.74 78.422,78.74 79.057,78.74 79.692,78.74 80.328,78.74 80.962,78.74 75.565,79.375 76.2,79.375 76.835,79.375 77.47,79.375 78.105,79.375 78.74,79.375 79.375,79.375 80.01,79.375 80.645,79.375 81.28,79.375 75.248,80.01 75.882,80.01 76.517,80.01 77.153,80.01 77.787,80.01 78.422,80.01 79.057,80.01 79.692,80.01 80.328,80.01 80.962,80.01 75.565,80.645 76.2,80.645 76.835,80.645 77.47,80.645 78.105,80.645 78.74,80.645 79.375,80.645 80.01,80.645 80.645,80.645 81.28,80.645 75.248,81.28 75.882,81.28 80.328,81.28 80.962,81.28 75.565,81.915 76.2,81.915 80.645,81.915 81.28,81.915 75.248,82.55 75.882,82.55 80.328,82.55 80.962,82.55 75.565,83.185 76.2,83.185 80.645,83.185 81.28,83.185